# Altium PCB PCB1.PcbDoc
Units mil, origin at the board's own origin, x right, y up, seen from the top; angles counter-clockwise.
Board outline 4200 x 3210 mil, 2 copper layers (Top Layer, Bottom Layer); 18 components, 20 nets, 129 pads, 4 vias.
Unrouted connection lines stored in the file: 1.
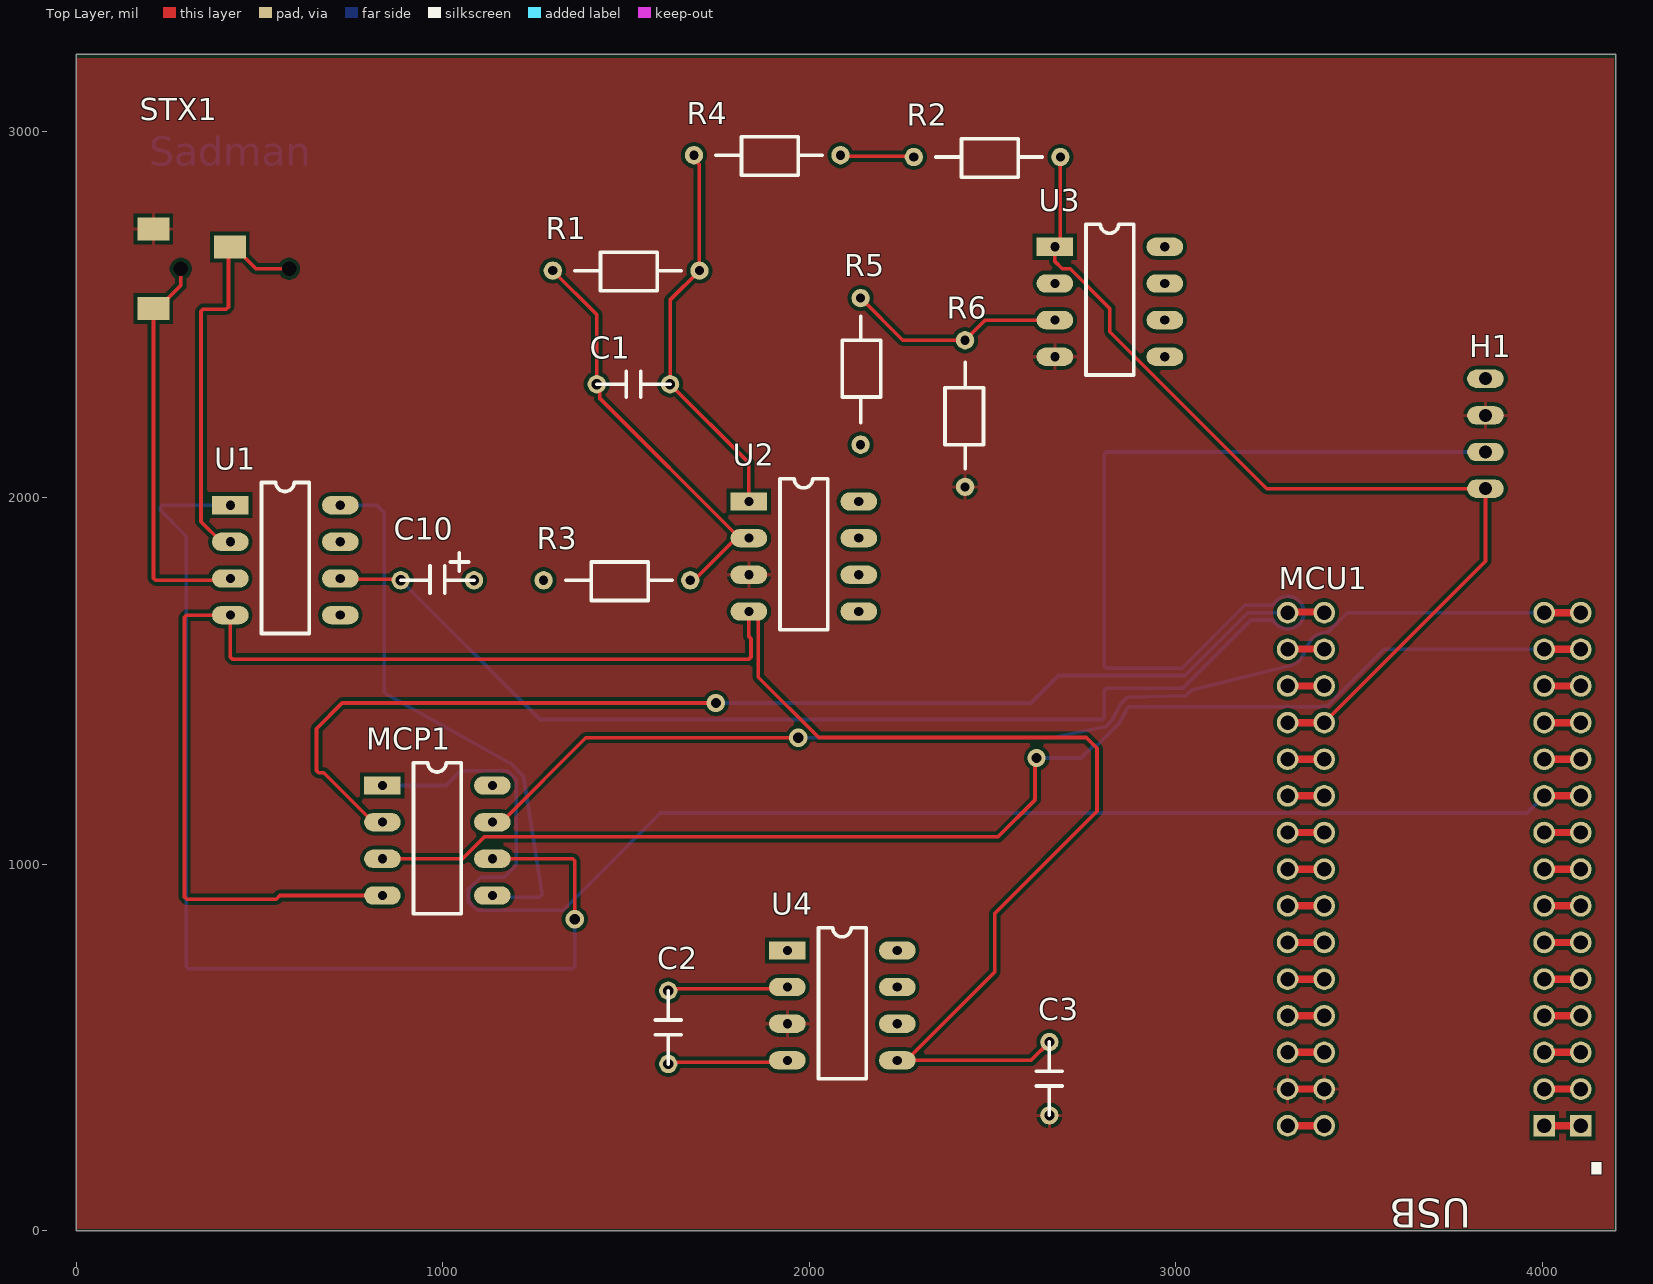
[diagram p0: Top Layer view]
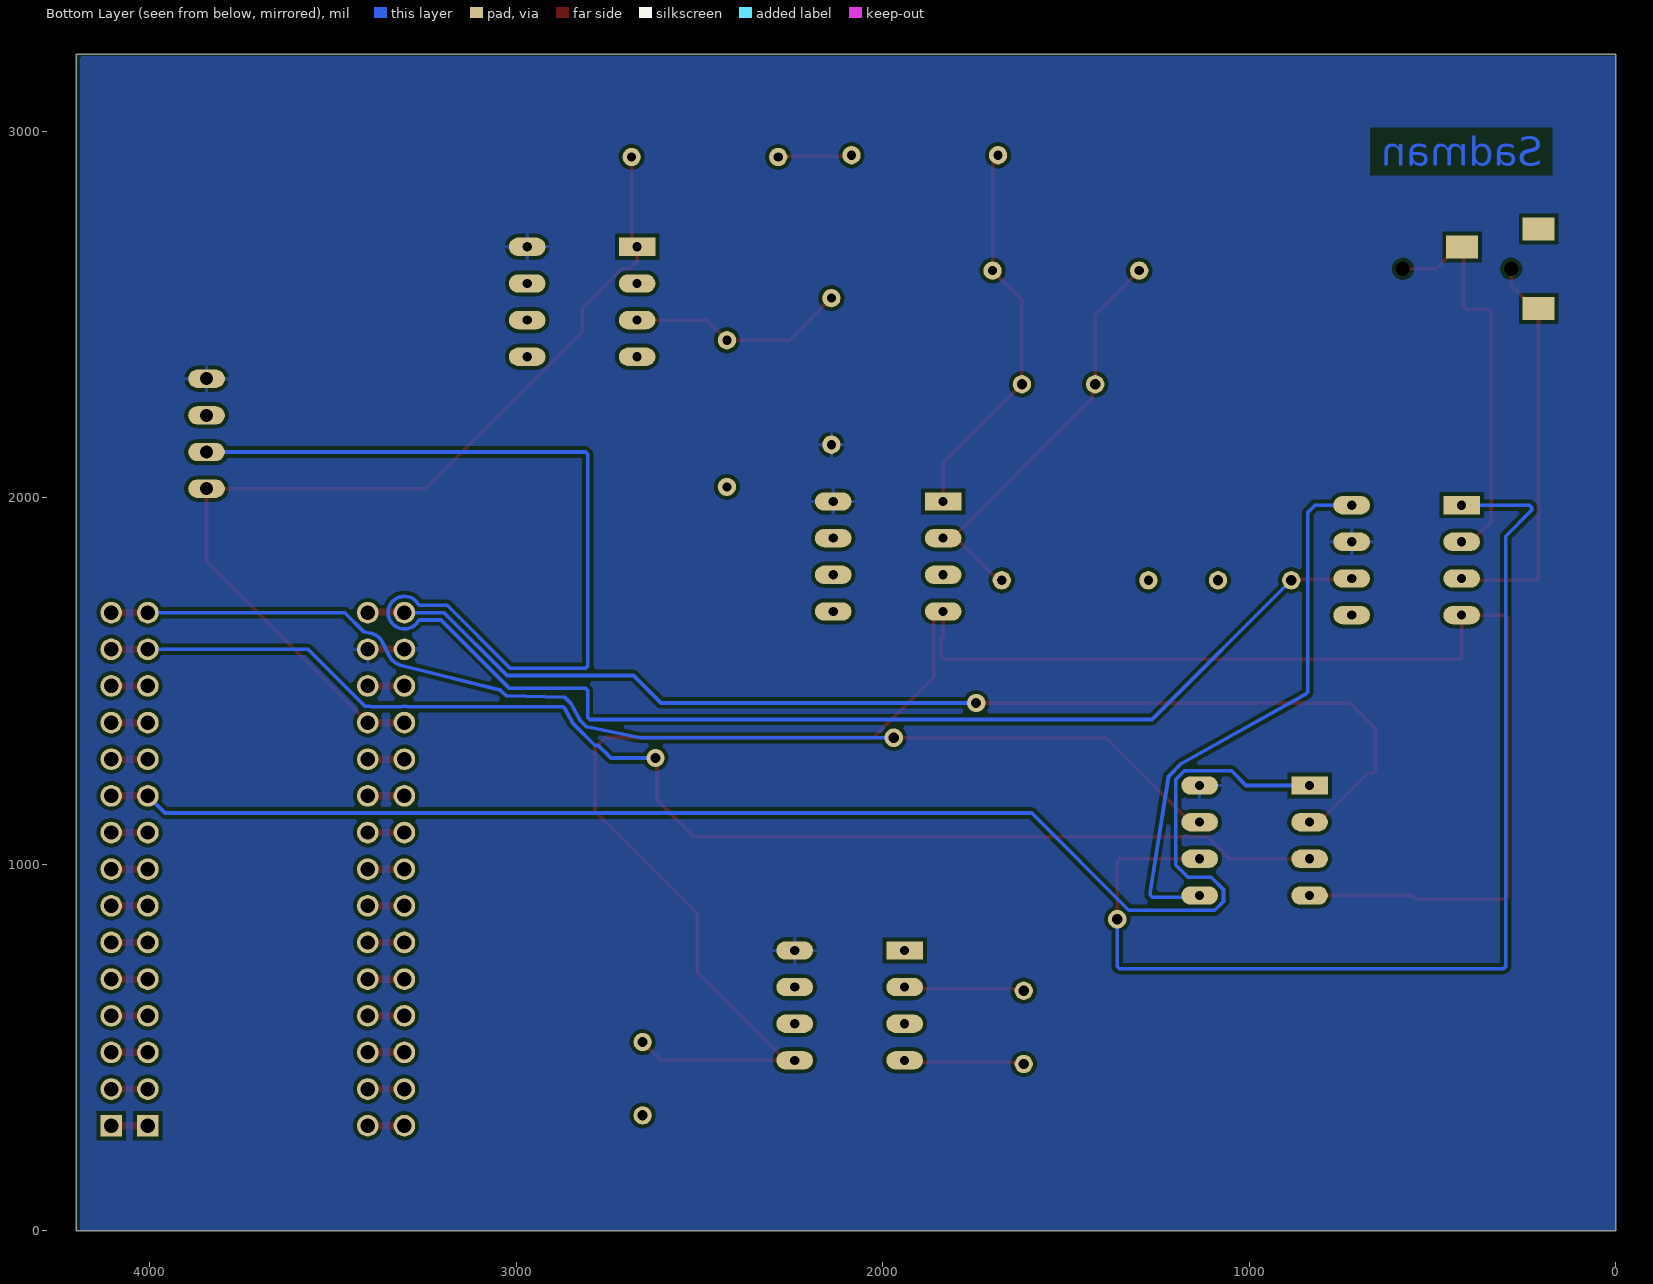
[diagram p1: Bottom Layer view, seen from below]

## Layer stack, top to bottom
Top Solder: solder mask 0.4, Solder Resist, Dk 3.5
Top Layer: signal copper 1.4
Dielectric 1: dielectric 12.6, FR-4, Dk 4.8
Bottom Layer: signal copper 1.4
Bottom Solder: solder mask 0.4, Solder Resist, Dk 3.5

## Board outline
0,0 4200,0 4200,3210 0,3210

## Design rules (kind name [scope] priority, off if disabled: settings)
Clearance [All] p1: gap=10 ignorepadtopadclearanceinfootprint=FALSE
PolygonConnect [All] p1: connectstyle=Relief reliefconductorwidth=10 reliefentries=4 polygonreliefangle="90 Angle" airgapwidth=10
RoutingVias [All] p1: holewidth=28 width=50 viastyle="Through Hole" minholewidth=28 minwidth=50 maxholewidth=28 maxwidth=50
SolderMaskExpansion [All] p1: expansion=4 istentingtop=FALSE
SupplyNets "Schematic Supply Nets" [InNet('GND')] p1: voltage=0.000
Width [All] p1: maxlimit=10 minlimit=10 preferedwidth=10
30 further rules are at their usual default settings.

## Components (designator, comment, footprint, x,y, rotation, side; value= is the part's Value field where it differs from the comment)
C1 "Cap-100pF" Capacitor 1620,2310 r180 top
C2 "Cap-10u" Capacitor 1615,455 r90 top
C3 "Cap-10u" Capacitor 2655,315 r90 top
C10 "Cap-22uF" "Capacitor - Polarized" 1085,1775 r180 top
H1 "Header4x1" "4 pin header" 3845,2325 r0 top
MCP1 "Digital-Pot_10k" DIP8 835,1215 r0 top
MCU1 "Nucleo F303K8_FINISHED" "Nucleo F303K8" 3705,986.72 r180 top
R1 "Res-3M" RESISTOR 1300,2620 r0 top
R2 "Res-10k" RESISTOR 2285,2930 r0 top
R3 "15k" RESISTOR 1275,1775 r0 top
R4 "20k" RESISTOR 1685,2935 r0 top
R5 "20k" RESISTOR 2140,2145 r90 top
R6 "Res-10k" RESISTOR 2425,2430 r270 top
STX1 "STX-3000" STX-3000 25.09,2625 r0 top
U1 "LT1920" DIP8 420,1980 r0 top
U2 "TL072" DIP8 1835,1990 r0 top
U3 "TL072" DIP8 2670,2685 r0 top
U4 "TC962" DIP8 1940,765 r0 top

## Footprints (in the part's own frame and the unit in brackets; to place one, negate y for a bottom-side part, rotate by r counter-clockwise, add the part's x,y. Pads: shape width x height; smd on the part's side, far side on the other; paste and mask are expansions set on the pad)
"4 pin header" [mm]
  oval 2.54x1.27 hole 0.9: 1(0,0) 2(0,-2.54) 3(0,-5.08) 4(0,-7.62)
Capacitor [mil] "200 mil"
  round 50 hole 28: 1(0,0) 2(200,0)
  silkscreen extent 0,-35 200,35
"Capacitor - Polarized" [mil] "200 mil"
  round 50 hole 28: 1(0,0) 2(200,0)
  silkscreen extent 0,-75 200,35
DIP8 [mil]
  rect 100x50 hole 25: 1(0,0)
  oval 100x50 hole 25: 2(0,-100) 3(0,-200) 4(0,-300) 5(300,-300) 6(300,-200) 7(300,-100) 8(300,0)
  silkscreen extent 85,-350 215,62
"Nucleo F303K8" [mm] "Nucleo Header"
  rect 1.5x1.5 hole 1: 1(-10.16,17.78) 1(-7.62,17.78)
  round 1.5 hole 1: 2(-10.16,15.24) 2(-7.62,15.24) 3(-10.16,12.7) 3(-7.62,12.7) 4(-10.16,10.16) 4(-7.62,10.16) 5(-10.16,7.62) 5(-7.62,7.62) 6(-10.16,5.08) 6(-7.62,5.08) 7(-10.16,2.54) 7(-7.62,2.54) 8(-10.16,0) 8(-7.62,0) 9(-10.16,-2.54) 9(-7.62,-2.54) 10(-10.16,-5.08) 10(-7.62,-5.08) 11(-10.16,-7.62) 11(-7.62,-7.62) 12(-10.16,-10.16) 12(-7.62,-10.16) 13(-10.16,-12.7) 13(-7.62,-12.7) 14(-10.16,-15.24) 14(-7.62,-15.24) 15(-10.16,-17.78) 15(-7.62,-17.78) 16(7.62,-17.78) 16(10.16,-17.78) 17(7.62,-15.24) 17(10.16,-15.24) 18(7.62,-12.7) 18(10.16,-12.7) 19(7.62,-10.16) 19(10.16,-10.16) 20(7.62,-7.62) 20(10.16,-7.62) 21(7.62,-5.08) 21(10.16,-5.08) 22(7.62,-2.54) 22(10.16,-2.54) 23(7.62,0) 23(10.16,0) 24(7.62,2.54) 24(10.16,2.54) 25(7.62,5.08) 25(10.16,5.08) 26(7.62,7.62) 26(10.16,7.62) 27(7.62,10.16) 27(10.16,10.16) 28(7.62,12.7) 28(10.16,12.7) 29(7.62,15.24) 29(10.16,15.24) 30(7.62,17.78) 30(10.16,17.78)
  Top Layer lines w0.508: 10.262,-17.831 10.16,-17.831 7.722,-17.831 ; 10.16,17.78 7.62,17.78 ; 10.16,15.24 7.62,15.24 ; 10.16,12.7 7.62,12.7 ; 10.16,10.16 7.62,10.16 ; 10.16,7.62 7.62,7.62 ; 10.16,5.08 7.62,5.08 ; 10.16,2.54 7.62,2.54 ; 10.16,0 7.62,0 ; 10.16,-2.54 7.62,-2.54 ; 10.16,-5.08 7.62,-5.08 ; 10.16,-7.62 7.62,-7.62 ; 10.16,-10.16 7.62,-10.16 ; 10.16,-12.7 7.62,-12.7 ; 9.982,-15.265 7.442,-15.265 ; -7.62,17.78 -10.16,17.78 ; -7.62,15.24 -10.16,15.24 ; -7.62,12.7 -10.16,12.7 ; -7.62,10.16 -10.16,10.16 ; -7.62,7.62 -10.16,7.62 ; -7.62,5.08 -10.16,5.08 ; -7.62,2.54 -10.16,2.54 ; -7.62,0 -10.16,0 ; -7.62,-2.54 -10.16,-2.54 ; -7.62,-5.08 -10.16,-5.08 ; -7.62,-7.62 -10.16,-7.62 ; -7.62,-10.16 -10.16,-10.16 ; -7.62,-12.7 -10.16,-12.7 ; -7.62,-15.24 -10.16,-15.24 ; -7.62,-17.78 -10.16,-17.78
RESISTOR [mil]
  round 50 hole 25: 1(0,0) 2(400,0)
  silkscreen extent 60,-55 350,50
STX-3000 [mm]
  rect 2.2x1.6 all layers, no hole: 1(10.002,1.5) 2(4.702,-2.75) 3(4.702,2.75)
  round 0 hole 1: 1(14.102,0) 2(6.602,0)

## Part data
C2 C3: Capacitance=10µF, Manufacturer="TDK Corporation", Manufacturer Part Number=FK26X7R1C106K, Operating Temperature="-55°C ~ 125°C", Package / Case=Radial, Ratings=-, Supplier Part Number 1=445-8549-ND, Temperature Coefficient=X7R, Tolerance=±10%, Voltage - Rated=16V, Applications="General Purpose", Category=Capacitors, ComponentLink1Description=https://product.tdk.com/info/en/documents/catalog/leadmlcc_conventional_fk_en.pdf, ComponentLink1URL=https://product.tdk.com/info/en/documents/catalog/leadmlcc_conventional_fk_en.pdf, Features=-, Height - Seated (Max)="0.236\" (6.00mm)", Lead Spacing="0.197\" (5.00mm)", Lead Style="Formed Leads - Kinked", Mounting Type="Through Hole", Packaging=Bulk, Pricing 1="1=0.45, 10=0.319, 100=0.2101, 250=0.17896, 500=0.1556, 1000=0.13226, 5000=0.1167, 10000=0.10892, 25000=0.10503 (USD)", RoHS="RoHS Compliant", Size / Dimension="0.217\" L x 0.138\" W (5.50mm x 3.50mm)", Stock 1=7933, Supplier 1=Digi-Key, Thickness (Max)=-
MCU1: "Nucleo F303K8", Current Rating=3A, Insulation Color=Black, Manufacturer="Sullins Connector Solutions", Manufacturer Part Number=PPTC151LFBN-RC, Material Flammability Rating="UL94 V-0", Operating Temperature="-40°C ~ 105°C", Supplier Part Number 1=S7013-ND, Voltage Rating=250V, Applications=-, Category="Connectors, Interconnects", ComponentLink1Description=http://www.sullinscorp.com/drawings/78_P(N)PxCxxxLFBN-RC,_10492-H.pdf, ComponentLink1URL=http://www.sullinscorp.com/drawings/78_P(N)PxCxxxLFBN-RC,_10492-H.pdf, Connector Type=Header, Contact Finish - Mating=Tin, Contact Finish - Post=Tin, Contact Finish Thickness - Mating=-, Contact Finish Thickness - Post=-, Contact Length - Post="0.126\" (3.20mm)", Contact Material="Phosphor Bronze", Contact Shape=Square, Contact Type="Female Socket", Fastening Type=Push-Pull, Features=-, Ingress Protection=-, Insulation Height="0.335\" (8.51mm)", Insulation Material=Polyester, Mated Stacking Heights=-, Mounting Type="Through Hole", Number of Positions=15, Number of Positions Loaded=All, Number of Rows=1, Packaging=Bulk, Part Status=Active, Pitch - Mating="0.100\" (2.54mm)", Pricing 1="1=1.22, 10=1.013, 25=0.9376, 50=0.8438, 100=0.75, 250=0.65624, 500=0.6, 1000=0.54375, 2500=0.4875 (USD)", RoHS="RoHS Compliant", Row Spacing - Mating=-, Stock 1=2938, Style="Board to Board", Supplier 1=Digi-Key, Termination=Solder
R1: Manufacturer="Stackpole Electronics Inc.", Manufacturer Part Number=CF14JT30K0, Operating Temperature="-55°C ~ 155°C", Package / Case=Axial, Power (Watts)="0.25W, 1/4W", Resistance (Ohms)=3Meg, Temperature Coefficient="0/ -500ppm/°C", Tolerance=±5%, Category=Resistors, ComponentLink1Description=https://www.seielect.com/Catalog/SEI-CF_CFM.pdf, ComponentLink1URL=https://www.seielect.com/Catalog/SEI-CF_CFM.pdf, Composition="Carbon Film", Failure Rate=-, Features="Flame Retardant Coating, Safety", Height - Seated (Max)=-, Packaging="Cut Tape (CT)", Part Status=Active, RoHS="RoHS Compliant", Size / Dimension="0.091\" Dia x 0.236\" L (2.30mm x 6.00mm)", Supplier 1=Arrow, Supplier Device Package=Axial
R2 R6: Manufacturer="Stackpole Electronics Inc.", Manufacturer Part Number=CF14JT10K0, Operating Temperature="-55°C ~ 155°C", Package / Case=Axial, Power (Watts)="0.25W, 1/4W", Resistance (Ohms)=10k, Supplier Part Number 1=CF14JT10K0CT-ND, Temperature Coefficient="0/ -500ppm/°C", Tolerance=±5%, Category=Resistors, ComponentLink1Description=http://www.seielect.com/catalog/SEI-CF_CFM.pdf, ComponentLink1URL=http://www.seielect.com/catalog/SEI-CF_CFM.pdf, Composition="Carbon Film", Features="Flame Retardant Coating, Safety", Height=-, Number of Terminations=2, Packaging="Cut Tape (CT)", Pricing 1="1=0.1, 10=0.04, 50=0.022, 100=0.0162, 250=0.01236, 500=0.0099, 1000=0.00729, 2500=0.00632 (USD)", RoHS="RoHS Compliant", Size / Dimension="0.091\" Dia x 0.256\" L (2.30mm x 6.50mm)", Stock 1=1509635, Supplier 1=Digi-Key, Supplier Device Package=Axial
R3: library part Res-15k, Supplier 1=Arrow
R4 R5: library part Res-20k, Supplier 1=Arrow
STX1: "3 Pole(s), Female, Surface Mount Terminal, Locking, Jack", Contact Resistance=60mR, Dielectric Withstanding Voltage (AC)=350V, Insulation Resistance=100MR, Manufacturer=Kycon, Max Operating Temperature=80°C, Min Operating Temperature=-25°C, Supplier Part Number=2092-STX-3000-ND, Additional Feature="ROHS COMPLIANT", Board Mounting Option="SOLDERABLE RETENTION CLIPS", Body Breadth=0.213inch, Body Depth=0.551inch, Body Length=0.283inch, Body/Shell Style=JACK, Category=Connectors, ComponentLink1Description=https://datasheet.ciiva.com:443/pdfs/VipMasterIC/IC/KYCO/KYCO-S-A0001347542/KYCO-S-A0002374289-1.pdf?src-supplier=IHS+Markit, ComponentLink1URL=https://datasheet.ciiva.com:443/pdfs/VipMasterIC/IC/KYCO/KYCO-S-A0001347542/KYCO-S-A0002374289-1.pdf?src-supplier=IHS+Markit, ComponentLink2Description=https://datasheet.ciiva.com/5053/stx-3000-182293-5053902.pdf?src-supplier=Mouser, ComponentLink2URL=https://datasheet.ciiva.com/5053/stx-3000-182293-5053902.pdf?src-supplier=Mouser, Connector Type="AUDIO/RCA CONNECTOR", Contact Finish - Mating="NOT SPECIFIED", Contact Finish - Termination="MATTE TIN", Contact Gender=Female, Contact Style="RND PIN-SKT", DIN Conformance=No, Durability=5000Cycles, IEC Conformance=No, Insertion Force-Max=3.9198N, JESD-609 Code=e3, Manufacturer Part Number=STX-3000, MIL Conformance=No, Mounting Option 1=LOCKING, Mounting Style="RIGHT ANGLE", Mounting Technology=Board, Number Of Connectors=1, Number of Poles=3, Number of Ports=1, Option="General Purpose", Polarization Key="POLARIZED HOUSING", Pricing="1=0.95, 10=0.727, 25=0.6536, 50=0.6036, 100=0.5579, 250=0.50376, 500=0.46714, 1000=0.4339, 3000=0.38746 (USD)", Reach SVHC Compliant=Yes, Reference Standard=UL, Reliability=COMMERCIAL, RoHS=Yes, RoHS Compliant=Yes, Stock=64025, Supplier=Digikey, Terminal Length=0.11inch, Termination=SMD/SMT, Withdrawl Force-Min=2.9468N
U1: Supplier Part Number 1=LT1920CN8#PBF-ND, Supplier 1=Digi-Key
U2 U3: Current - Output / Channel=-, Current - Supply=1.4mA, Manufacturer="Texas Instruments", Manufacturer Part Number=TL072IP, Operating Temperature="-40°C ~ 85°C", Package / Case="8-DIP (0.300\", 7.62mm)", Supplier Device Package=8-PDIP, Supplier Part Number 1=296-14997-5-ND, Voltage - Supply, Single/Dual (±)="7 V ~ 36 V, ±3.5 V ~ 18 V", -3db Bandwidth=-, Amplifier Type=J-FET, Category="Integrated Circuits (ICs)", ComponentLink1Description=http://www.ti.com/lit/ds/symlink/tl071a.pdf, ComponentLink1URL=http://www.ti.com/lit/ds/symlink/tl071a.pdf, Mounting Type="Through Hole", Number of Circuits=2, Output Type=-, Packaging=Tube, Part Status=Active, Pricing 1="1=0.69, 10=0.607, 100=0.4655, 500=0.368, 1000=0.2944 (USD)", RoHS="RoHS Compliant", Slew Rate="13 V/µs", Stock 1=2537, Supplier 1=Digi-Key
U4: Supplier Part Number 1=TC962CPA-ND, Supplier 1=Digi-Key
C1: Supplier 1=Digi-Key

## Via types
v1: diameter 50, hole 28, Top Layer to Bottom Layer, 4 vias

## Nets (pads, with @x,y where several pads share a name; then routed paths per layer and width w, separated by ;. In a path a pad name is that pad's centre, name@x,y a point inside that pad or via, vN(x,y) a via of type N, cw(c..) or ccw(c..) an arc to the next point about the centre after c; other vN are vias at no path point)
3.3V: H1.1 MCP1.8 MCU1.17 R5.1 U1.7 U2.8 U3.8 U4.8
-3.3V: C3.2 MCP1.4 U1.4 U2.4 U4.5 | length 5805.3
  Top Layer w10: MCP1.4 555.02,915 545.02,905 300.86,905 295,910.86 295,1674.14 300.86,1680 U1.4 420,1565.86 425.86,1560 1835,1560 1840.86,1565.86 1840.86,1615.76 1835,1621.62 U2.4 1842.38,1690 1860.86,1671.52 1860.86,1510.71 2025.75,1345.81 2755.75,1345.81 2785,1316.57 2785,1144.85 2505.86,865.71 2505.86,705.86 U4.5@2265,465 ; U4.5 U4.5@2265,465 ; C3.2 2605,465 U4.5@2265,465
D7: MCP1.1 MCU1.10 | length 3889.1
  Bottom Layer w10: MCP1.1 1008.28,1215 1048.28,1255 1176.57,1255 1200,1231.57 1200,998.43 1166.57,965 1103.43,965 1070,931.57 1070,898.43 1093.43,875 1328.43,875 1593.43,1140 3958.28,1140 MCU1.10@4005,1186.72
D11: MCP1.3 MCU1.14 | length 3478.4
  Top Layer w10: MCP1.3 1053.43,1015 1113.43,1075 2515,1075 2615.77,1175.77 2615.77,1285.77 v1(2620,1290)
  Bottom Layer w10: v1(2620,1290) 2741.57,1290 2776.57,1325 2785.71,1325 2843.49,1382.78 2844.42,1383.85 2845.69,1385.54 2867.29,1424.82 2867.98,1426.07 2871.91,1430 3294.52,1430 cw(c3305,1386.72) 3315.48,1430 3394.52,1430 cw(c3405,1386.72) 3405,1431.25 3412.5,1431.25 3415.33,1434.08 3567.97,1586.72 MCU1.14@4005,1586.72
D12: MCP1.7 MCU1.15 | length 3089.7
  Top Layer w10: MCP1.7 1160,1115 1390,1345 v1(1970,1345)
  Bottom Layer w10: v1(1970,1345) 2660.86,1345 2807.43,1375 2825,1392.57 2850.31,1438.59 2865.39,1453.68 2867.88,1456.17 3026.57,1460 3044.26,1475.67 3315.79,1543.52 ccw(c3305,1586.72) 3344.65,1566.47 3365.35,1606.98 cw(c3405,1586.72) 3396.35,1630.4 3415.43,1634.18 3467.97,1686.72 MCU1.15@4005,1686.72
D13: MCP1.2 MCU1.16 | length 3143.7
  Top Layer w10: MCP1.2 810,1115 675,1250 660.86,1250 655,1255.86 655,1370 725,1440 v1(1745,1440) v1@1755,1440
  Bottom Layer w10: v1(1745,1440) 2605,1440 2680,1515 3025,1515 3196.72,1686.72 MCU1.16@3305,1686.72
GND: C3.1 H1.2 MCU1.29 R6.2 STX1.3 U2.3 U3.4 U4.3
Level_Shifter_Out: H1.4 MCU1.19 R2.2 U3.1 | length 2580.5
  Top Layer w10: R2.2 2685,2700 U3.1 2670,2645 2690,2625 2711.57,2625 2820,2516.57 2820,2453.43 3248.43,2025 H1.4 3845,1826.72 MCU1.19@3405,1386.72
LT1920_Out: C10.2 H1.3 U1.6 | length 5251.7
  Top Layer w10: U1.6 722.5,1777.5 882.5,1777.5 C10.2
  Bottom Layer w10: C10.2 1262.07,1397.93 1265,1395 2799.14,1395 2802.07,1397.93 ; 2802.09,1397.94 2805,1400.86 2805,1474.14 2810.86,1480 3018.28,1480 3205.01,1666.72 3263.61,1666.72 3266.54,1663.79 3267.29,1663.04 ccw(c3305,1686.72) 3267.29,1710.41 3266.54,1709.65 3263.61,1706.72 3188.44,1706.72 3016.72,1535 2810.86,1535 2807.93,1537.93 2805,1540.86 2805,2119.14 2810.86,2125 H1.3
NetC1_1: C1.1 R1.2 R4.1 U2.1 | length 1073.4
  Top Layer w10: R4.1 1685,2924.18 1700,2909.18 R1.2 1620,2540 C1.1 1835,2095 U2.1
NetC1_2: C1.2 R1.1 R3.2 U2.2 | length 1138.9
  Top Layer w10: R1.1 1420,2500 C1.2 1427.65,2302.35 1427.65,2272.35 1810,1890 U2.2 ; R3.2 1685,1775 U2.2@1800,1890
NetC2_1: C2.1 U4.4 | length 329.1
  Top Layer w10: C2.1 1620,460 1935,460 U4.4
NetC2_2: C2.2 U4.2 | length 329.1
  Top Layer w10: C2.2 1620,660 1935,660 U4.2
NetC10_1: C10.1 R3.1
NetR2_1: R2.1 R4.2 | length 202.1
  Top Layer w10: R4.2 2087.5,2932.5 2282.5,2932.5 R2.1
NetR5_2: R5.2 R6.1 U3.3 | length 600.4
  Top Layer w10: R5.2 2255,2430 R6.1 2480,2485 U3.3
NetSTX1_1: STX1.1 U1.2 | length 1107.5
  Top Layer w10: U1.2 395,1880 340,1935 340,2509.14 345.86,2515 409.14,2515 415,2520.86 415,2680.2 418.86,2684.06 430.67,2684.06 489.72,2625 580.28,2625
NetSTX1_2: STX1.2 U1.3 | length 1096.3
  Top Layer w10: 285,2625 285,2579.72 222.01,2516.73 210.2,2516.73 210.2,1780.86 216.05,1775 415,1775 U1.3
POB: MCP1.6 U1.1 | length 3056.5
  Top Layer w10: MCP1.6 1354.14,1015 1360,1009.14 v1(1360,850)
  Bottom Layer w10: U1.1 235,1980 229.14,1974.14 229.14,1965.86 300,1895 300,720.86 305.86,715 1354.14,715 1360,720.86 v1(1360,850)
POW: MCP1.5 U1.8 | length 1531.9
  Bottom Layer w10: U1.8 820,1980 840,1960 840,1470 845.86,1464.14 1184.85,1275 1220,1239.85 1270,924.14 1270,915.86 1267.07,912.93 1264.14,910 1140,910 MCP1.5
pads on no net: MCU1.1 MCU1.2 MCU1.3 MCU1.4 MCU1.5 MCU1.6 MCU1.7 MCU1.8 MCU1.9 MCU1.11 MCU1.12 MCU1.13 MCU1.18 MCU1.20 MCU1.21 MCU1.22 MCU1.23 MCU1.24 MCU1.25 MCU1.26 MCU1.27 MCU1.28 MCU1.30 U1.5 U2.5 U2.6 U2.7 U3.2 U3.5 U3.6 U3.7 U4.1 U4.6 U4.7

## Polygon pours and split planes (outlines as drawn)
GND on Top Layer "Top_Layer_GND" (solid, pour order 0): 0,3200 4195,3200 4195,5 0,5
3.3V on Bottom Layer "Bottom_Layer_3.3V" (solid, pour order 1): 0,3205 4200,3205 4190,3195 4190,0 0,0

## Text inside footprints (layer, text, board x,y; h text height)
MCU1: Top Overlay "USB" at 3805,86.72 h78.74 r180
STX1: Bottom Layer "Sadman" at 198.32,2905.75 h78.74